# EAGLE board LiPo-Charger-Basic-v10 (EAGLE 6.4)
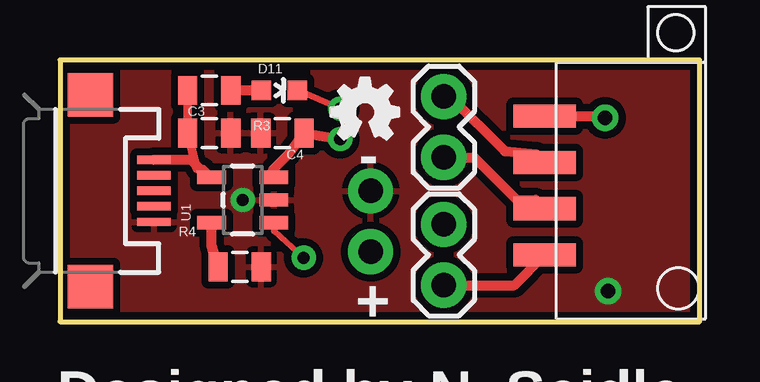
[diagram p0: board, top side]
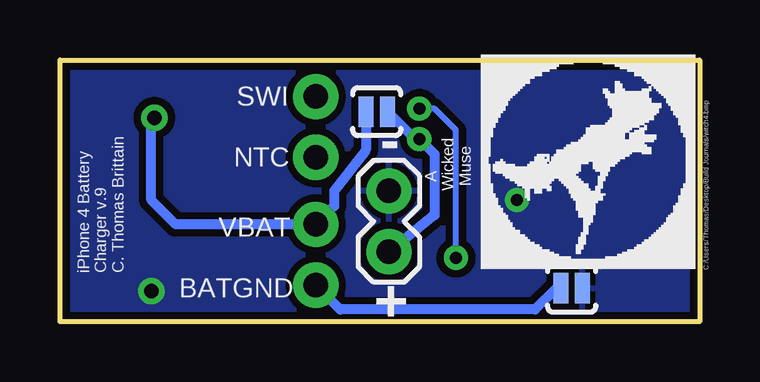
[diagram p1: board, bottom side, seen from below]

Size 26.67 x 10.92 mm. Coordinates in mm from the lower left corner, seen from the top.
Outline: 26.67,0 26.67,10.92 0,10.92 0,0 26.67,0
Copper layers (1*16): Top 0.035mm / dielectric 1.5mm / Bottom 0.035mm
Design rules "SparkFun": minimum track width 8mil, minimum drill 20mil, track to track 8mil, track to pad 8mil, pad to pad 8mil, via to via 8mil, smd to smd 6mil, copper to edge 8mil, drill to drill 8mil, minimum pad ring 12mil, minimum via ring 10mil, stop-mask expansion 4mil, vias tented up to drill 25mil, thermal gap 10mil

## Footprints (pad centres in the part's own frame; a part is rotated, then mirrored left to right if it is on the bottom)
0805 = smd 0.8 x 1.2: 1 -0.9,0; 2 0.9,0
LED-0603 = smd 0.8 x 0.8: A 0,-0.75; C 0,0.75
1X02 = drill 1.016 pad 1.88: 1 0,0; 2 2.54,0
SJ_2S-NO = smd 0.635 x 1.27: 1 -0.45,0; 2 0.45,0
SOT23-5 = smd 0.55 x 1.2: 1 -0.95,-1.3; 2 0,-1.3; 3 0.95,-1.3; 4 0.95,1.3; 5 -0.95,1.3
IPHONE4_CONNECTOR = smd 2.6 x 0.965: GND -0.5,2.66; NTC -0.5,4.59; SWI -0.5,6.52; VBAT -0.5,8.45
USB-MICROB = smd 0.35 x 1.4: D+ 0,2.65; D- -0.65,2.65; GND 1.3,2.65; ID 0.65,2.65; VBUS -1.3,2.65 | smd 1.8 x 1.9: MT1 -4,0; MT2 4,0

## Placement (x,y rotation side)
C3  4.7uF  [0805]  6.22,7.87 0 top
C4  4.7uF  [0805]  9.27,7.87 180 top
D11  RED  [LED-0603]  9.14,9.65 270 top
JP1  [1X02]  16,1.52 90 top
JP2  [1X02]  16,6.86 90 top
JP8  [1X02]  12.95,5.46 270 bottom
R3  330  [0805]  6.22,9.65 180 top
R4  2K  [0805]  7.49,2.29 0 top
SJ1  SOLDERJUMPERNO  [SJ_2S-NO]  13.46,8.76 180 bottom
SJ2  SOLDERJUMPERNO  [SJ_2S-NO]  5.33,1.4 180 bottom
U1  MCP73831  [SOT23-5]  7.62,5.08 90 top
U$1  IPHONE4_CONNECTOR  [IPHONE4_CONNECTOR]  20.7,0.13 0 top
U$2  [BAND_LOGO_SMALL]  0.13,2.16 90 bottom
U$3  [OSHW_FILLX100_NOTEXT]  11.3,7.62 0 top
X1  Micro USB  [USB-MICROB]  1.27,5.46 270 top

## Library data of the parts
C3 C4 D11 JP1 JP2 JP8 R3 R4 SJ1 SJ2 U1 X1 = SparkFun
U$1 U$2 = Random parts
U$3 = ohw-logo

## Nets
BATGND: JP1.1 SJ2.2 U$1.GND
GND: C3.2 C4.2 JP8.1 R4.2 SJ2.1 U1.2 X1.GND
N$3: D11.A R3.1
NTC: JP2.1 U$1.NTC
PROG: R4.1 U1.5
STAT: D11.C U1.1
SWI: JP2.2 U$1.SWI
VBAT: JP1.2 SJ1.2 U$1.VBAT
VCC: C4.1 JP8.2 SJ1.1 U1.3
VIN: C3.1 R3.2 U1.4 X1.VBUS

## Tracks (layer width: path | path; a pad name or v marks a point on that pad's centre or on a via)
BATGND
  Top 0.406: JP1.1 18.94,1.52 U$1.GND
  Bottom 0.406: SJ2.2 5.97,1.4 6.86,0.51 14.99,0.51 JP1.1
GND  (via drill 0.51, 0.6)
  other vias: 7.62,5.08 22.86,1.27
  pour Bottom (isolate 0.305): 0,0 0.13,10.92 27.18,10.92 27.05,0
  pour Top (isolate 0.305): 0.13,10.92 27.18,10.92 27.05,0 0,0
N$3
  Top 0.406: R3.1 D11.A
NTC
  Top 0.406: JP2.1 17.27,6.86 19.05,5.08 19.84,5.08 U$1.NTC
PROG
  Top 0.406: U1.5 6.32,3.19 R4.1
STAT  (via drill 0.51)
  Top 0.254: v11.68,8.89 D11.C | U1.1 8.92,3.78 v10.16,2.67
  Bottom 0.254: v11.68,8.89 11.05,8.89 10.16,8 v10.16,2.67
SWI
  Top 0.406: JP2.2 16.26,9.4 18.54,7.11 19.86,6.99 U$1.SWI
VBAT  (via drill 0.6)
  Top 0.406: U$1.VBAT 22.66,8.58 v22.73,8.51
  Bottom 0.406: v22.73,8.51 22.86,8.38 22.86,5.08 21.84,4.06 JP1.2 15.24,4.83 15.24,5.46 13.91,7.17 SJ1.2
VCC  (via drill 0.51)
  Top 0.406: v11.68,7.62 C4.1 9.54,7 8.89,6.35 8.89,6.06 U1.3
  Bottom 0.406: JP8.2 11.05,4.45 11.05,6.99 v11.68,7.62 11.87,7.62 SJ1.1
VIN
  Top 0.356: U1.4 5.97,6.38 5.84,6.38 5.71,6.38 5.7,6.39 C3.1 R3.2
  Top 0.406: X1.VBUS 5.46,6.76 5.84,6.38

## Text on the board
tPlace: - | + | Designed by N. Seidle | Redesigned by C. Thomas Brittain / 7-29-13 / www.ubermentis.com
bPlace: - | +
bNames: SWI | NTC | VBAT | BATGND
_bsilk: A / Wicked / Muse | iPhone 4 Battery / Charger v.9 / C. Thomas Brittain